# EAGLE board schematic (EAGLE 8.2.1)
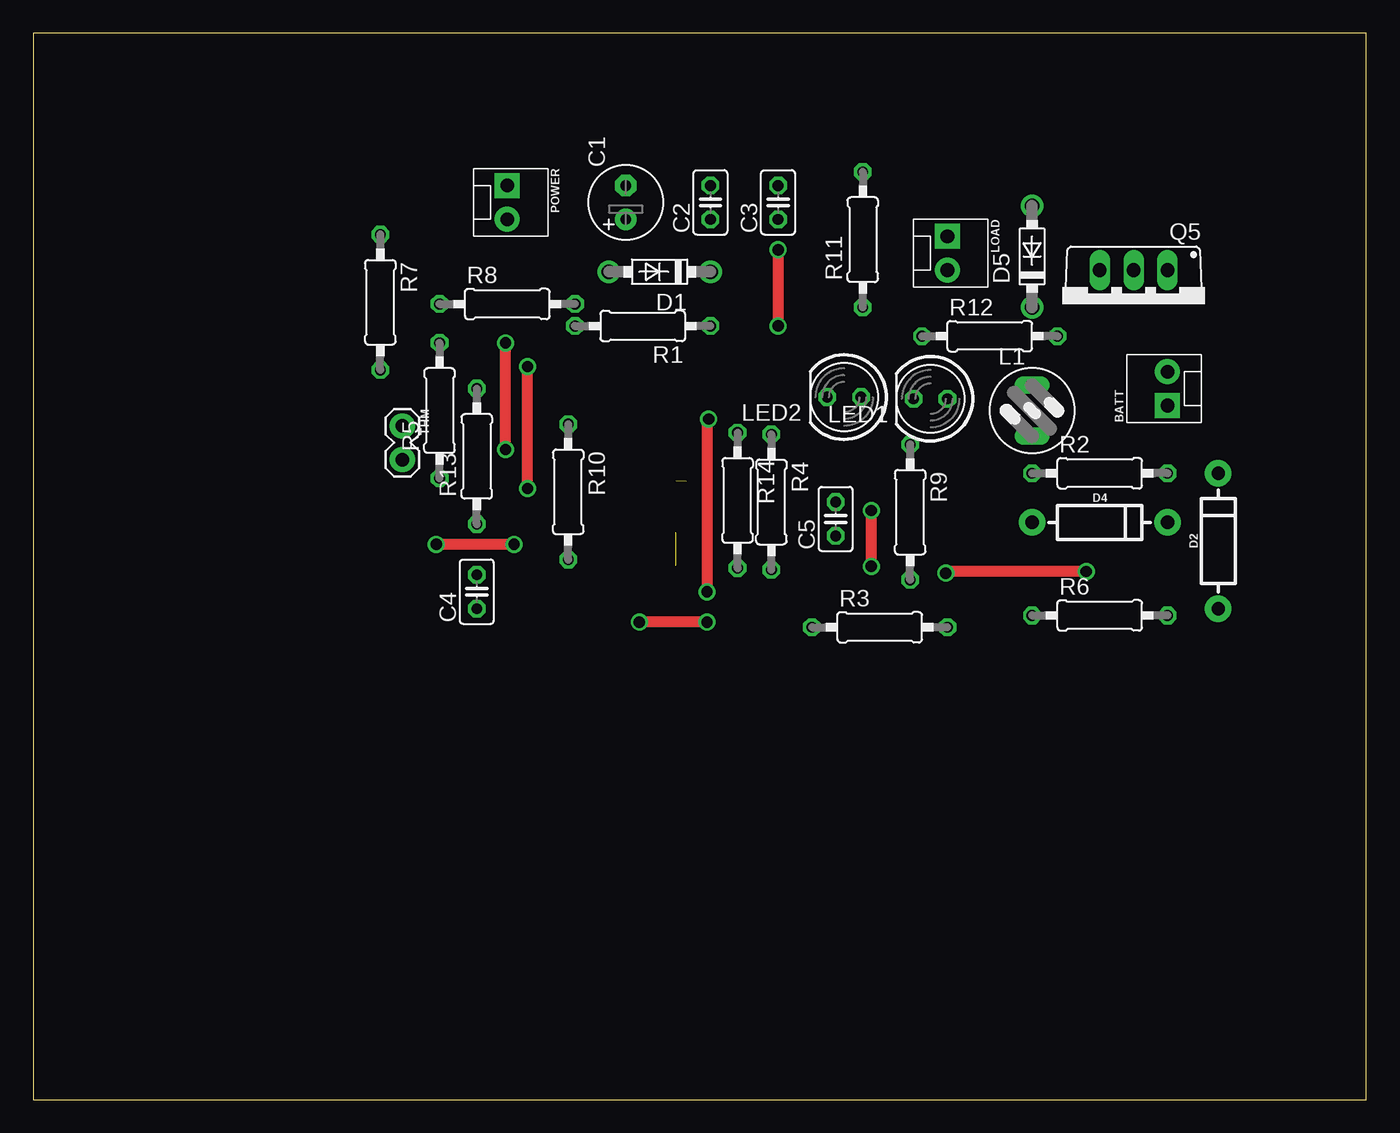
[diagram p0: board, top side]
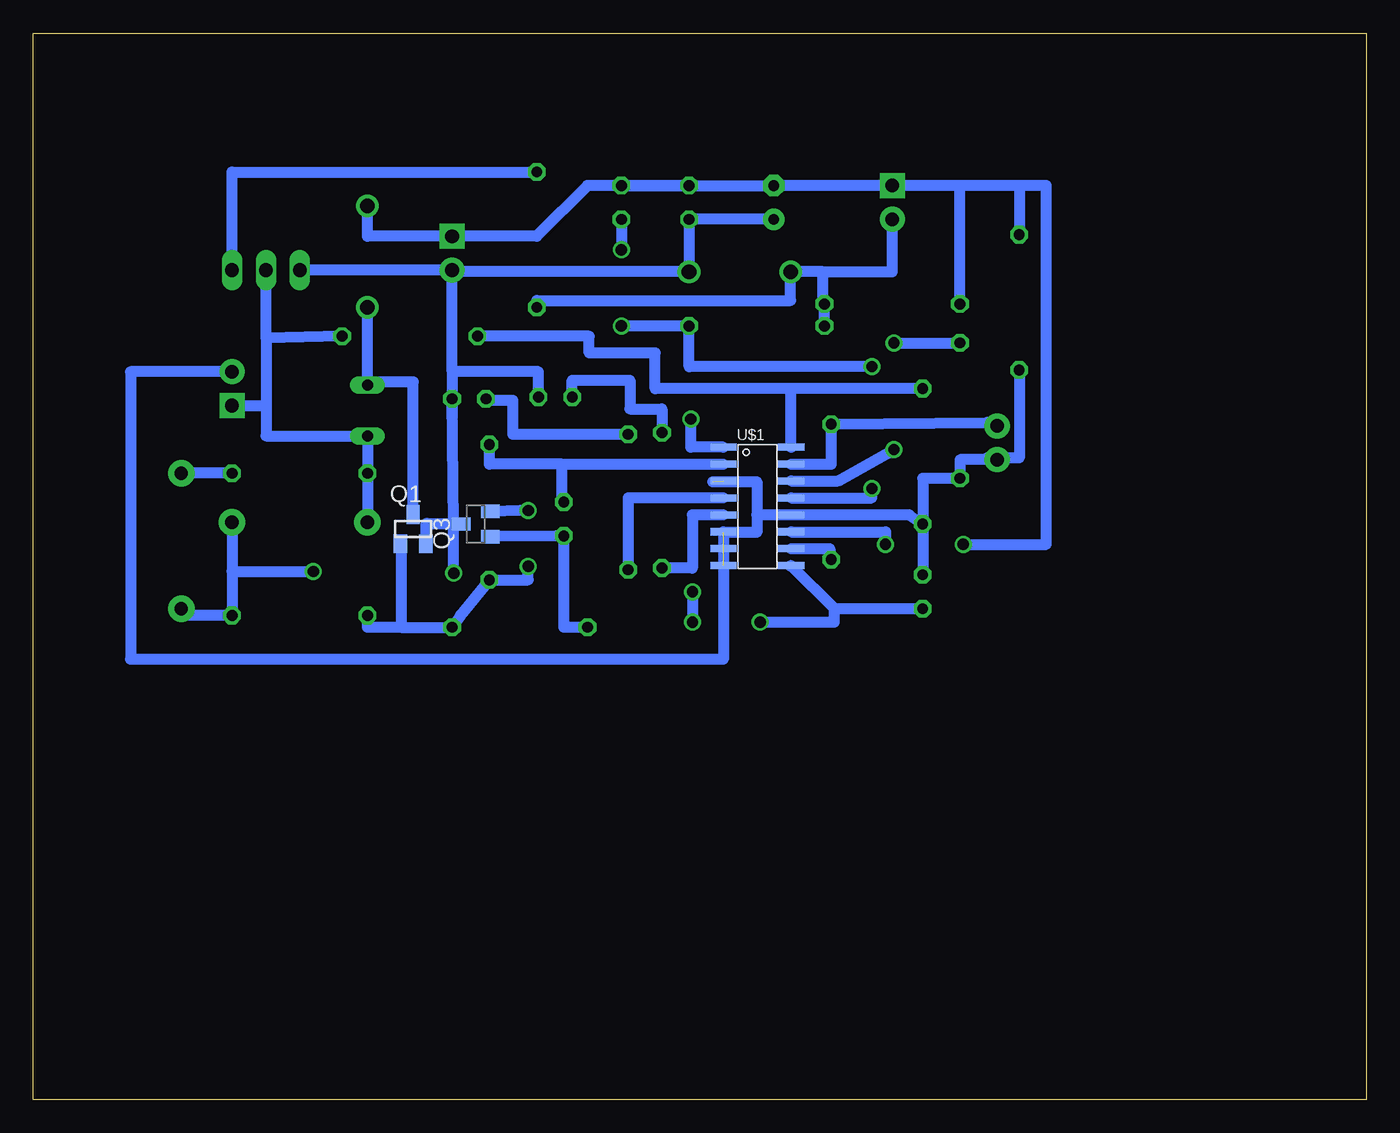
[diagram p1: board, bottom side, seen from below]

Size 100 x 80 mm. Coordinates in mm from the lower left corner, seen from the top.
Outline: 0,0 100,0 100,80 0,80 0,0
Copper layers (1*16): Top 0.035mm / dielectric 1.5mm / Bottom 0.035mm
Design rules "default": minimum track width 6mil, minimum drill 0.35mm, track to track 6mil, track to pad 6mil, pad to pad 6mil, via to via 6mil, smd to smd 6mil, copper to edge 40mil, drill to drill 6mil, minimum pad ring 10mil, minimum via ring 8mil, stop-mask expansion 4mil, vias tented up to drill 0mil, thermal gap 10mil

## Footprints (pad centres in the part's own frame; a part is rotated, then mirrored left to right if it is on the bottom)
MOLEX-1X2 = drill 1.016 pad 1.88 square: 1 0,0 | drill 1.016 pad 1.88: 2 2.54,0
E2,5-6 = drill 0.813 pad 1.6: + -1.27,0 | drill 0.813 pad 1.6 octagon: - 1.27,0
C025-025X050 = drill 0.813 octagon: 1 -1.27,0; 2 1.27,0
DO41-7.6 = drill 1.1 pad 1.7: A 3.81,0; C -3.81,0
DIODE-1N4001 = drill 1 pad 1.981: A -5.08,0; C 5.08,0
82114R = drill 0.813 long: 1 0,1.905; 2 0,-1.905
LED5MM = drill 0.813 octagon: A -1.27,0; K 1.27,0
SUPER-SOT3 = smd 1 x 1.4: 1 -0.95,-1.1; 2 0.95,-1.1; 3 0,1.1
SOT23 = smd 1 x 1.4: 1 -0.95,-1.1; 2 0.95,-1.1; 3 0,1.1
TO220BV = drill 1.016 long: D 0,-2.54; G -2.54,-2.54; S 2.54,-2.54
0207/10 = drill 0.813 octagon: 1 -5.08,0; 2 5.08,0
1X02 = drill 1.016 pad 1.88: 1 0,0; 2 2.54,0
DS2715-SO16 = smd 1.98 x 0.53: 1 -2.5,4.5; 2 -2.5,3.23; 3 -2.5,1.96; 4 -2.5,0.69; 5 -2.5,-0.58; 6 -2.5,-1.85; 7 -2.5,-3.12; 8 -2.5,-4.39; 9 2.58,-4.39; 10 2.58,-3.12; 11 2.58,-1.85; 12 2.58,-0.58; 13 2.58,0.69; 14 2.58,1.96; 15 2.58,3.23; 16 2.58,4.5

## Placement (x,y rotation side)
BATT  [MOLEX-1X2]  85.09,52.07 90 top
C1  47uF  [E2,5-6]  44.45,67.31 90 top
C2  1uF  [C025-025X050]  50.8,67.31 90 top
C3  0.1uF  [C025-025X050]  55.88,67.31 90 top
C4  0.1uF  [C025-025X050]  33.27,38.1 90 top
C5  1nF  [C025-025X050]  60.2,43.56 90 top
D1  1N5817-B  [DO41-7.6]  46.99,62.1 180 top
D2  1A/50V/1.1V  [DIODE-1N4001]  88.9,41.91 90 top
D4  1A/50V/1.1V  [DIODE-1N4001]  80.01,43.31 0 top
D5  1N5817-B  [DO41-7.6]  74.93,63.25 90 top
L1  82114R  [82114R]  74.93,51.69 0 top
LED1  [LED5MM]  67.31,52.58 180 top
LED2  [LED5MM]  60.83,52.7 180 top
LOAD  [MOLEX-1X2]  68.58,64.77 270 top
POWER  [MOLEX-1X2]  35.56,68.58 270 top
Q1  FDN360P  [SUPER-SOT3]  71.5,42.8 0 bottom
Q3  BSS123  [SOT23]  66.8,43.18 90 bottom
Q5  [TO220BV]  82.55,59.69 180 top
R1  150  [0207/10]  45.72,58.04 180 top
R2  220  [0207/10]  80.01,46.99 0 top
R3  820  [0207/10]  63.5,35.43 0 top
R4  1k  [0207/10]  55.37,44.83 270 top
R5  160k  [0207/10]  30.48,51.69 90 top
R6  330  [0207/10]  80.01,36.32 0 top
R7  0.1  [0207/10]  26.04,59.82 270 top
R8  100k  [0207/10]  35.56,59.69 0 top
R9  470  [0207/10]  65.79,44.07 270 top
R10  10k  [0207/10]  40.13,45.59 270 top
R11  100  [0207/10]  62.23,64.52 90 top
R12  500k  [0207/10]  71.75,57.28 0 top
R13  100k  [0207/10]  33.27,48.26 90 top
R14  1k  [0207/10]  52.83,44.96 270 top
THM  [1X02]  27.69,50.55 270 top
U$1  DS2715  [DS2715-SO16]  45.72,44.45 0 bottom

## Library data of the parts
BATT LOAD POWER = SparkFun-Connectors; SF_ID: PRT-09918
C1-C5 R1-R14 = rcl
D1 D5 = diode
D2 D4 = SparkFun-DiscreteSemi; PROD_ID: DIO-09176
L1 = inductors
LED1 LED2 = led
Q1 Q5 = transistor-power
Q3 = transistor-small-signal
THM = SparkFun-Connectors
U$1 = ic-ds2715-nimh-charger

## Nets
GND: C1.- C2.2 C3.2 D5.A LOAD.1 POWER.1 R7.1 R8.1 U$1.11
N$1: Q5.G R11.2
N$2: LED2.K R14.1
N$3: R14.2 U$1.5
N$4: BATT.2 C4.2 R5.1 R7.2 R13.1 THM.2 U$1.3 U$1.6 U$1.7 U$1.8 U$1.12
N$5: R10.1 THM.1 U$1.15
N$6: R10.2 U$1.10
N$7: R12.1 R13.2 U$1.16
N$8: BATT.1 D4.A L1.2 Q5.D R2.1 R12.2
N$9: R4.2 U$1.4
N$10: D5.C L1.1 Q1.3
N$12: C5.2 R9.1 U$1.2
N$13: Q1.1 Q3.2 R3.2 R6.1 R9.2
N$14: C5.1 Q3.1 R3.1
N$15: LED1.K R4.1
N$17: D2.C R2.2
N$19: C3.1 R1.1 U$1.13
N$20: R5.2 U$1.14
N$23: C4.1 U$1.1 U$1.9
N$25: D1.A POWER.2 R1.2 R8.2 R11.1
N$26: C1.+ C2.1 D1.C D2.A D4.C LED1.A LED2.A LOAD.2 Q1.2 Q3.3 Q5.S R6.2

## Tracks (layer width: path | path; a pad name or v marks a point on that pad's centre or on a via)
GND  (via drill 0.85)
  Top 0.813: v36.07,41.66 v30.23,41.66
  Bottom 0.813: C3.2 C1.- POWER.1 30.48,68.58 | C3.2 58.42,68.58 62.23,64.77 LOAD.1 74.93,64.77 D5.A | R8.1 30.48,68.58 | 26.04,68.58 R7.1 | 26.04,68.58 30.48,68.58 | U$1.11 36.07,42.6 v36.07,41.66 | v30.23,41.66 24,41.66 24,68.58 26.04,68.58 | C2.2 C3.2
N$1
  Bottom 0.813: Q5.G 85.09,69.6 R11.2
N$2
  Bottom 0.813: LED2.K 59.56,53.98 55.24,53.98 55.24,51.82 52.83,51.82 R14.1
N$3
  Bottom 0.813: U$1.5 50.55,43.87 50.55,39.88 R14.2
N$4  (3 unrouted)
  Bottom 0.813: R13.1 C4.2 | BATT.2 92.71,54.61 92.71,33.02 48.22,33.02 U$1.6 48.22,42.55 45.72,42.55 45.72,43.87 | R13.1 34.29,43.87 U$1.12 45.72,43.87 | 45.72,43.87 45.72,46.35 49.02,46.35 | R7.2 26.04,48.13 28.45,48.13 THM.2 30.48,48.01 R5.1 33.27,46.61 R13.1
N$5
  Bottom 0.813: U$1.15 40.13,47.68 R10.1 28.45,50.8 THM.1
N$6
  Bottom 0.813: U$1.10 40.26,41.33 R10.2
N$7
  Bottom 0.813: R12.1 58.29,57.28 58.29,56.01 53.34,56.01 53.34,53.34 43.14,53.34 | U$1.16 43.14,53.34 | R13.2 43.14,53.34
N$8
  Bottom 0.813: 82.55,57.15 Q5.D | 82.55,57.15 82.55,52.07 | BATT.1 82.55,52.07 | 82.55,52.07 82.55,49.78 L1.2 R2.1 D4.A | R12.2 82.55,57.15
N$9
  Bottom 0.813: U$1.4 55.37,45.14 R4.2
N$10
  Bottom 0.813: D5.C L1.1 74.93,53.85 71.5,53.85 Q1.3
N$12
  Bottom 0.813: 60.33,47.68 U$1.2 | 60.33,47.68 65.79,47.68 R9.1 | C5.2 60.33,44.83 60.33,47.68
N$13  (via drill 0.85)
  Top 0.813: v62.87,40.01 v62.87,44.2
  Bottom 0.813: v62.87,40.01 62.87,38.99 R9.2 67.94,36.32 R3.2 72.39,35.43 | v62.87,44.2 63.42,44.2 Q3.2 | 72.39,35.43 74.93,35.43 R6.1 | Q1.1 72.39,41.7 72.39,35.43
N$14
  Bottom 0.813: Q3.1 60.75,42.29 C5.1 60.2,35.43 R3.1
N$15
  Bottom 0.813: R4.1 64.01,49.91 64.01,52.45 66.04,52.45 LED1.K
N$17
  Bottom 0.813: R2.2 D2.C
N$19  (via drill 0.85)
  Top 0.813: v55.88,63.75 v55.88,58.04 | v37.08,45.85 v37.08,54.99
  Bottom 0.813: C3.1 v55.88,63.75 | v55.88,58.04 R1.1 50.8,54.99 v37.08,54.99 | U$1.13 37.08,45.14 v37.08,45.85
N$20  (via drill 0.85)
  Top 0.813: v35.43,48.77 v35.43,56.77
  Bottom 0.813: U$1.14 39.62,46.41 v35.43,48.77 | v35.43,56.77 R5.2
N$23  (via drill 0.85)
  Top 0.813: v50.67,51.05 50.55,51.05 v50.55,38.1 | v50.55,35.81 v45.47,35.81
  Bottom 0.813: 39.91,36.83 C4.1 | U$1.9 39.91,36.83 | U$1.9 43.18,40.06 43.18,40.01 43.14,40.01 U$1.9 | U$1.1 50.67,48.95 v50.67,51.05 | v50.55,38.1 v50.55,35.81 | v45.47,35.81 39.91,35.81 39.91,36.83
N$25
  Bottom 0.813: R1.2 R8.2 40.77,59.69 40.77,62.1 | R11.1 62.23,59.94 43.18,59.94 D1.A 40.77,62.1 | 40.77,62.1 35.56,62.1 POWER.2
N$26  (via drill 0.85)
  Top 0.813: v78.99,39.62 68.45,39.62 v68.45,39.5
  Bottom 0.813: C1.+ C2.1 D1.C 68.58,62.1 | Q5.S LOAD.2 68.58,62.1 | D2.A 88.9,36.32 R6.2 85.09,39.62 | 85.34,43.31 D4.C 85.09,39.62 | 70.48,43.22 Q1.2 70.55,43.18 68.45,43.18 | 68.45,43.18 Q3.3 | 68.45,43.18 LED1.A | LED1.A 68.58,51.18 | 68.58,54.61 LED1.A | 68.58,54.61 68.58,62.1 | v68.45,39.5 68.45,43.18 | 85.09,39.62 v78.99,39.62 | LED2.A 62.1,54.61 68.58,54.61